# Altium PCB HMS.Tran.PcbDoc
Units mm, origin at the board's own origin, x right, y up, seen from the top; angles counter-clockwise.
Board outline 19.68 x 13.2 mm, 2 copper layers (Top Layer, Bottom Layer); 13 components, 9 nets, 28 pads, 20 vias.
Unrouted connection lines stored in the file: 1.
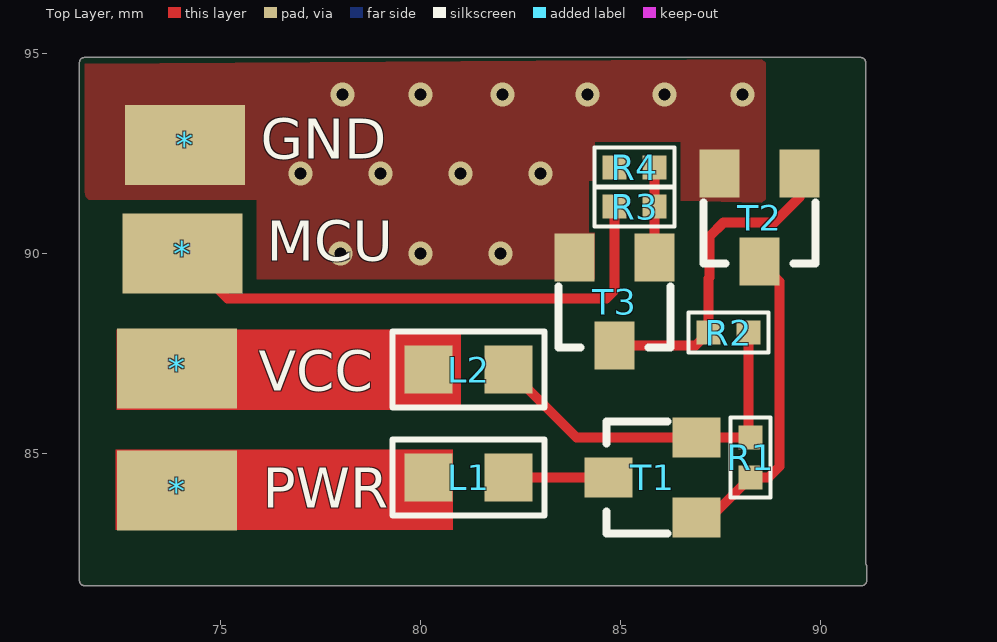
[diagram p0: Top Layer view]
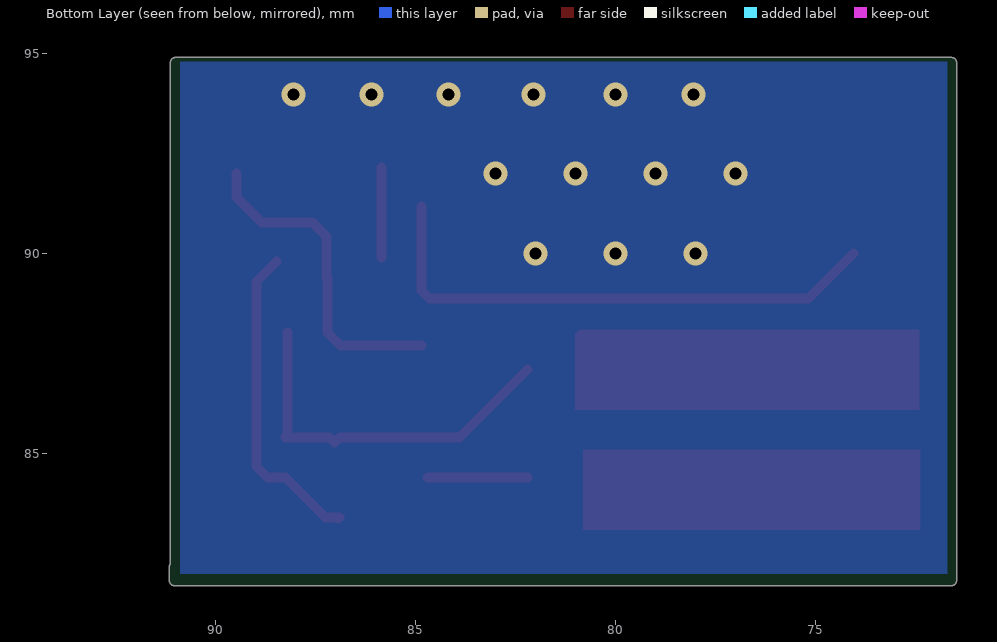
[diagram p1: Bottom Layer view, seen from below]
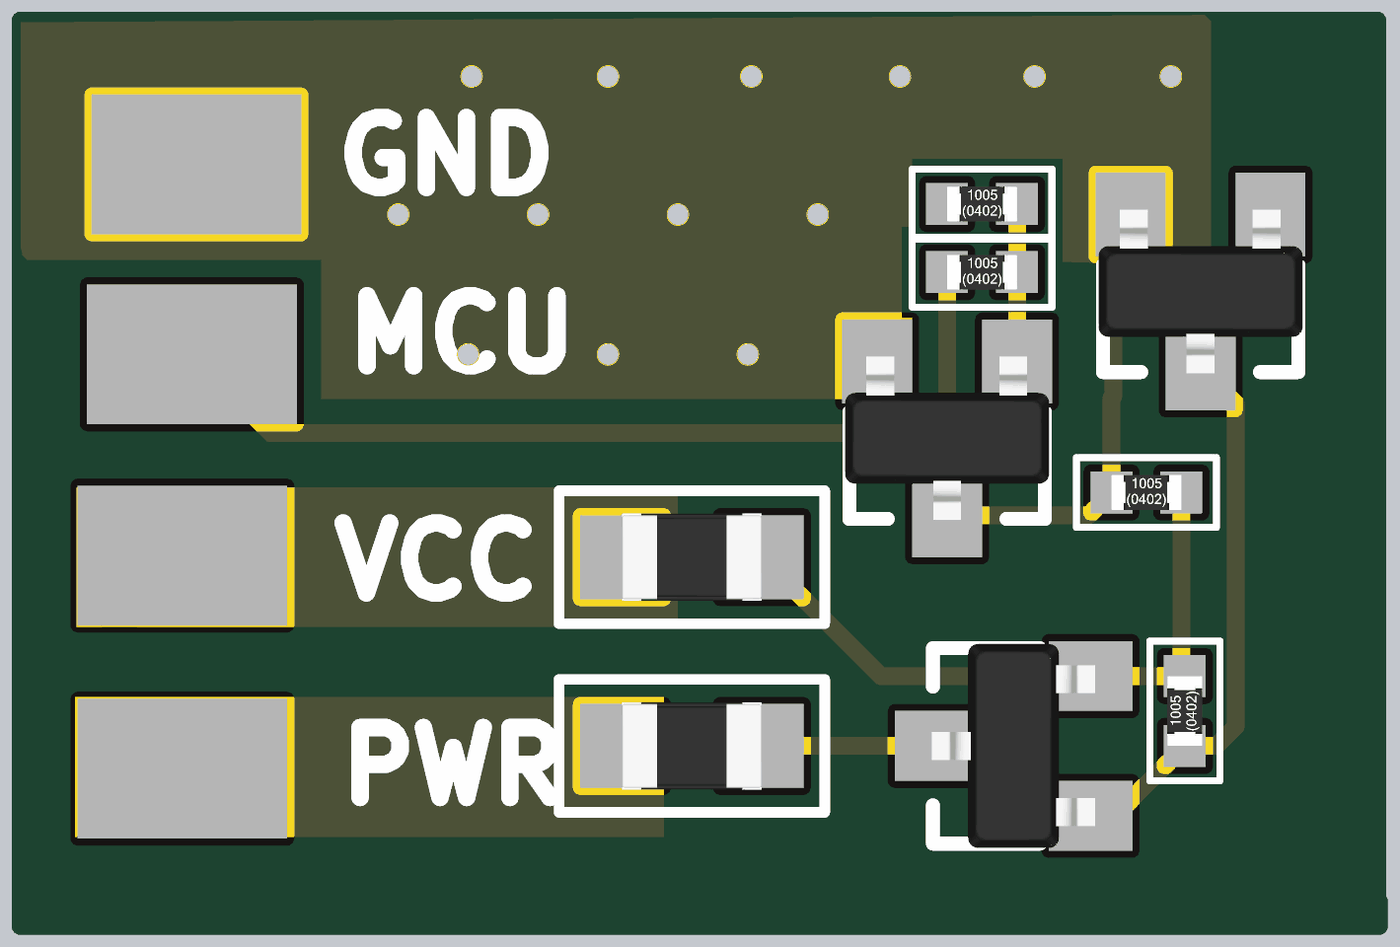
[diagram p2: 3D render of the assembled board from above, using the file's embedded part models]

## Layer stack, top to bottom
Top Solder: solder mask 0.0102, Solder Resist, Dk 3.5
Top Layer: signal copper 0.0356
Dielectric 1: dielectric 0.32, FR-4, Dk 4.8
Bottom Layer: signal copper 0.0356
Bottom Solder: solder mask 0.0102, Solder Resist, Dk 3.5

## Board outline
71.6,81.698 cw(c71.6,81.825) 71.473,81.825 71.473,94.775 cw(c71.6,94.775) 71.6,94.902 91,94.902 cw(c91,94.775) 91.127,94.775 91.127,82.245 cw(c91.025,82.169) 91.152,82.169 91.152,81.825 cw(c91.025,81.825) 91.025,81.698

## Design rules (kind name [scope] priority, off if disabled: settings)
Clearance [All] p1: gap=0.254 ignorepadtopadclearanceinfootprint=FALSE except(0: Arc-Hole Track-Hole SMDPad-Hole THPad-Hole Via-Hole Fill-Hole Poly-Hole Region-Hole Text-Hole; 0.35: Arc-Fill Arc-Poly Arc-Region Track-Fill Track-Poly Track-Region SMDPad-Fill SMDPad-Poly SMDPad-Region THPad-Fill THPad-Poly THPad-Region Via-Fill Via-Poly Via-Region Fill-Fill Fill-Poly Fill-Region Poly-Poly Poly-Region Region-Region)
PlaneConnect [All] p1: planeconnectstyle=Direct reliefexpansion=0.508 reliefentries=4 reliefconductorwidth=0.254 reliefairgap=0.254
PolygonConnect [All] p1: connectstyle=Direct reliefconductorwidth=0.254 reliefentries=4 polygonreliefangle="90 Angle" airgapwidth=0.254
RoutingVias [All] p1: holewidth=0.711 width=1.27 viastyle="Through Hole" minholewidth=0.711 minwidth=1.27 maxholewidth=0.711 maxwidth=1.27
SolderMaskExpansion [All] p1: expansion=0.102
Width [All] p1: maxlimit=1.2 minlimit=0.254 preferedwidth=0.8
29 further rules are at their usual default settings.

## Classes and differential pairs
component class HMS.Tran: * L1 L2 R2 R3 R4 T1 T3

## Components (designator, comment, footprint, x,y, rotation, side; value= is the part's Value field where it differs from the comment)
* "GND" TestpoitSMD 74.114,92.718 r0 top
* "PWR" TestpoitSMD 73.914,84.074 r0 top
* "MCU" TestpoitSMD 74.05,90 r0 top
* "VCC" TestpoitSMD 73.914,87.122 r0 top
L1 "47uH" MPZ0805 81.2,84.4 r180 top
L2 "47uH" MPZ0805 81.2,87.1 r180 top
R1 "10K" RES_0402(1005) 88.25,84.9 r90 top value=0603
R2 "10K" RES_0402(1005) 87.7,88.025 r0 top value=0603
R3 "1K" RES_0402(1005) 85.35,91.175 r0 top value=0603
R4 "10K" RES_0402(1005) 85.35,92.15 r0 top value=0603
T1 "A03415" SOT23-3 85.8,84.4 r90 top
T2 "C1815" SOT23-3 88.475,90.9 r180 top value="50V 150mA"
T3 "C1815" SOT23-3 84.85,88.8 r180 top value="50V 150mA"

## Footprints (in the part's own frame and the unit in brackets; to place one, negate y for a bottom-side part, rotate by r counter-clockwise, add the part's x,y. Pads: shape width x height; smd on the part's side, far side on the other; paste and mask are expansions set on the pad)
MPZ0805 [mm]
  rect 1.2x1.2 smd: 1(-1,0) 2(1,0)
  silkscreen extent -1.9,-0.95 1.9,0.95, body extent -1,-0.62 1,0.63, height 0.95
RES_0402(1005) [mm] "Chip Inductor, Body 1.0x0.5mm, IPC High Density"
  rect 0.6x0.6 smd: 1(-0.5,0) 2(0.5,0)
  silkscreen extent -1,-0.5 1,0.5, body extent -0.5,-0.25 0.5,0.25, height 0.35
SOT23-3 [mm]
  round 0.5 on Top Overlay: 1(-1.016,0)
  rect 1x1.2 smd: 1(-1,-1.1) 2(1,-1.1) 3(0,1.1)
  silkscreen extent -1.4,-0.38 1.4,1.15, body extent -1.46,-1.17 1.46,1.17, height 1
TestpoitSMD [mm]
  rect 3x2 smd: 1(0,0)

## Part data
* * * *: library part "Test Point SMD"
L1 L2: library part CBC2012T470M, "INDUCTOR 47UH 20% 0805 SMD", Current - Saturation=120mA, Current Rating=150mA, DC Resistance (DCR)="7.54 Ohm Max", Frequency - Self Resonant=11MHz, Frequency - Test=2.52MHz, Inductance=47µH, MFR="Taiyo Yuden", Operating Temperature="-40°C ~ 105°C", Package / Case="0805 (2012 Metric)", Q @ Freq=-, Supplier Part Number 1=587-1605-1-ND, Tolerance=±20%, Category="Inductors, Coils, Chokes", ComponentLink1Description=http://www.yuden.co.jp/ut/product/category/inductor/CBC2012T470M.pdf, ComponentLink1URL=http://www.yuden.co.jp/ut/product/category/inductor/CBC2012T470M.pdf, Material - Core=-, Mounting Type="Surface Mount", MPN=CBC2012T470M, Packaging="Cut Tape (CT)", Pricing 1="1=0.2, 10=0.188, 50=0.1762, 100=0.1645, 500=0.12926, 1000=0.10575 (USD)", RoHS="RoHS Compliant", Shielding=Unshielded, Size / Dimension="0.079\" L x 0.049\" W x 0.049\" H (2.00mm x 1.25mm x 1.25mm)", Stock 1=108934, Supplier 1=Digi-Key, Type=-
R1 R2 R3 R4: library part R0402, "Resistor SMD 0402", LatestRevisionDate=17-Jul-2002, LatestRevisionNote="Re-released for DXP Platform.", PackageReference=AXIAL-0.4, Published=8-Jun-2000, Publisher="Altium Limited"
T1: "PNP General Purpose Amplifier", MFR=LinhKienChatLuong, Category="Transistor PNP", MPN=A03415
T2 T3: library part C18C5, "50V 150mA NPN SMD Transistor SOT-23 Package", MFR=LinhKienChatLuong, MPN=2SC1815-HF, Category="Transistor NPN"

## Via types
v1: diameter 0.6, hole 0.3, Top Layer to Bottom Layer, tented both sides, 20 vias

## Nets (pads, with @x,y where several pads share a name; then routed paths per layer and width w, separated by ;. In a path a pad name is that pad's centre, name@x,y a point inside that pad or via, vN(x,y) a via of type N, cw(c..) or ccw(c..) an arc to the next point about the centre after c; other vN are vias at no path point)
GND: *.1@74.114,92.718 R4.1 T2.2 T3.2
  other v1: 78,90 78,90 80,90 80,90 82,90 82,90 77,92 77,92 79,92 79,92 81,92 81,92 83,92 83,92 78.05,93.975 80,93.975 82.05,93.975 84.175,93.975 86.1,93.975 88.05,93.975
MCU: *.1@74.05,90 R3.1 | length 13.4
  Top Layer w0.254: *.1@74.05,90 75.175,88.875 84.65,88.875 84.85,89.075 R3.1
NetL1_1: L1.1 T1.3 | length 2.5
  Top Layer w0.254: L1.1 T1.3
NetL2_1: L2.1 R1.2 R2.2 T1.2 | length 9.5
  Top Layer w0.254: L2.1 83.9,85.4 T1.2 87.025,85.275 87.15,85.4 R1.2 88.2,85.45 R2.2
NetR1_1: R1.1 T1.1@86.9,83.4 T2.3 | length 8
  Top Layer w0.254: T1.1@86.925,83.375 86.9,83.4 87.25,83.4 R1.1 88.7,84.4 88.975,84.675 88.975,89.3 T2.3
NetR2_1: R2.1 T2.1@89.475,92 T3.3 | length 8.1
  Top Layer w0.254: T3.3 86.875,87.7 R2.1 87.2,89.375 87.225,89.4 87.225,90.425 87.581,90.781 88.85,90.781 89.475,91.406 T2.1@89.475,92
NetR3_2: R3.2 R4.2 T3.1@85.85,89.9 | length 2.2
  Top Layer w0.254: T3.1@85.85,89.9 R3.2 R4.2
PWR: *.1@73.914,84.074 L1.2
VCC: *.1@73.914,87.122 L2.2
pads on no net: T1.1@85.8,83.384 T2.1@89.491,90.9 T3.1@85.866,88.8

## Polygon pours and split planes (outlines as drawn)
GND on Bottom Layer (solid, remove dead copper, pour order 4): 71.7,94.8 71.7,82 90.877,82 90.877,94.8
GND on Top Layer (solid, remove dead copper, pour order 6): 71.6,94.75 71.6,82.025 71.65,81.975 71.7,82.025 91.9,82.025 91.9,94.8 91.825,94.875

## Other copper
Top Layer:
  pour cut-out: 84.35,89.333 84.35,92.8 86.5,92.8 86.5,89.4 86.488,89.387
  pour cut-out: 93.4,90.475
  pour cut-out: 86.4,91.325 86.4,89.475 86.575,89.3 86.646,89.371 91.9,89.371 91.9,91.4 91.767,91.267 91.867,91.267 91.95,91.35 91.804,91.496 91.804,94.875 88.975,94.875 88.95,94.85 88.925,94.875 88.625,94.875 88.625,91.267
  pour cut-out: 71.625,91.425 71.7,91.35 75.9,91.35 75.9,88.85 75.775,88.725 71.65,88.725
  pour cut-out: 71.65,89.225 71.65,82.225 71.525,82.1 71.6,82.025 91.9,82.025 91.9,89.3 91.85,89.35
  pour cut-out: 86.1,90.825
  pour cut-out: 71.9,91.075
  region net PWR: 72.375,85.1 72.375,83.1 80.8,83.1 80.8,85.1
  region net VCC: 72.4,88.1 72.4,86.1 81,86.1 81,88 80.9,88.1

## Silkscreen, mask and mechanical layers (free items; w line width, h text height)
Top Overlay:
  text "GND" at 76,92.375 h1
  text "MCU" at 76.15,89.825 h1
  text "VCC" at 75.95,86.575 h1
  text "PWR" at 76.05,83.65 h1
Mechanical 1:
  lines w0.254: 71.6,81.825 71.6,94.775 91,94.775 91,82.169 91.025,82.169 91.025,81.825 71.6,81.825